# Altium PCB CANDAQ.PcbDoc (part 1 of 2)
Units mm, origin at the board's own origin, x right, y up, seen from the top; angles counter-clockwise.
Board outline 156.2 x 85.4 mm, 2 copper layers (Top Layer, Bottom Layer); 108 components, 143 nets, 695 pads, 135 vias.
Unrouted connection lines stored in the file: 92.
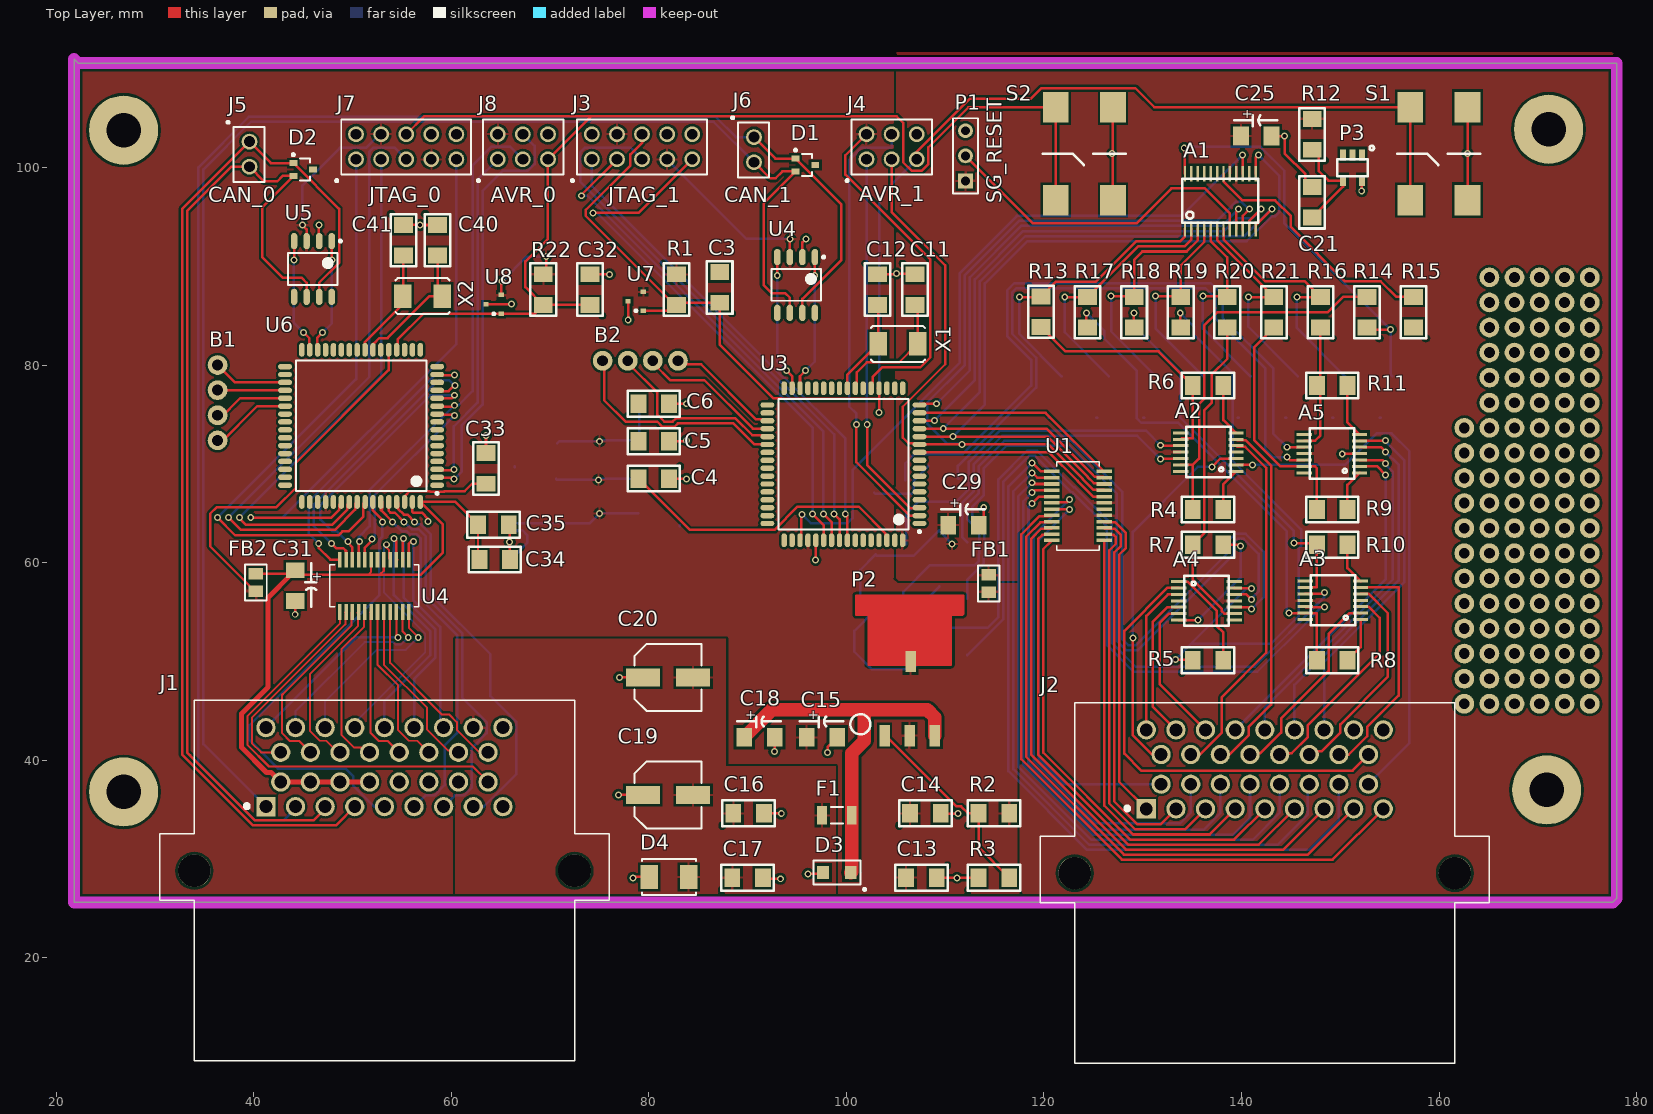
[diagram p0: Top Layer view]
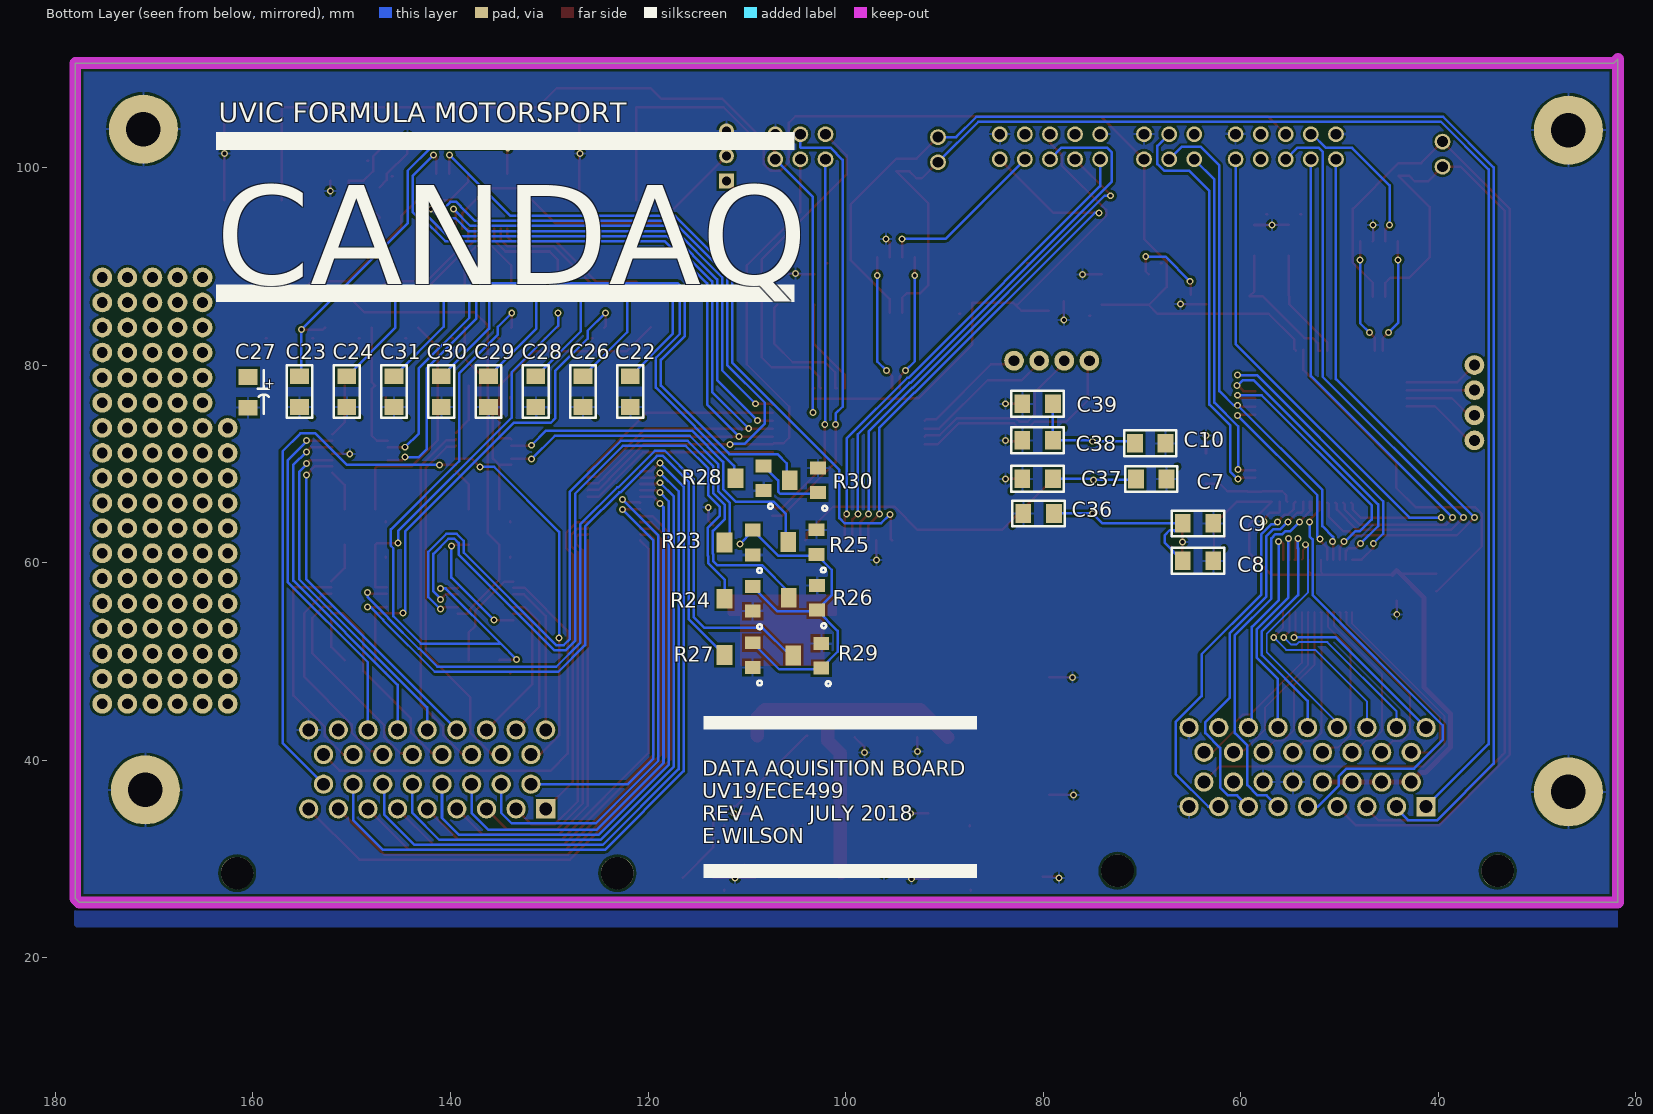
[diagram p1: Bottom Layer view, seen from below]

## Layer stack, top to bottom
Top Solder: solder mask 0.0102, Solder Resist, Dk 3.5
Top Layer: signal copper 0.0356
Dielectric 1: dielectric 0.32, FR-4, Dk 4.8
Bottom Layer: signal copper 0.0356
Bottom Solder: solder mask 0.0102, Solder Resist, Dk 3.5

## Board outline
21.8,111 21.8,25.6 177.6,25.6 178,26 178,110.6 22.2,110.6

## Design rules (kind name [scope] priority, off if disabled: settings)
Clearance [All] p1: gap=0.254 ignorepadtopadclearanceinfootprint=FALSE except(0: Arc-Hole Track-Hole SMDPad-Hole THPad-Hole Via-Hole Fill-Hole Poly-Hole Region-Hole Text-Hole)
PolygonConnect [All] p1: connectstyle=Relief reliefconductorwidth=0.254 reliefentries=4 polygonreliefangle="90 Angle" airgapwidth=0.254
RoutingVias [All] p1: holewidth=0.711 width=1.27 viastyle="Through Hole" minholewidth=0.711 minwidth=1.27 maxholewidth=0.711 maxwidth=1.27
SolderMaskExpansion [All] p1: expansion=0.102
Width [All] p1: maxlimit=2 minlimit=0.1 preferedwidth=0.254
30 further rules are at their usual default settings.

## Classes and differential pairs
component class "Strain Gauge Amplifiers": A2 A3 A4 A5 R4 R5 R6 R7 R8 R9 R10 R11 R23 R24 R25 R26 R27 R28 R29 R30
component class "Strain Gauge ADC": A1 C21 C22 C23 C24 C25 C26 C27 C28 C29 C30 C31 P3 R12 R13 R14 R15 R16 R17 R18 R19 R20 R21
component class Power: C15 C16 C17 C18 C19 C20 D3 D4 F1 P2 R2 R3
component class Peripherials: C13 C14 D1 D2 U4 U5
component class MicrocontrollerTwo: C32 C33 C34 C35 C36 C37 C38 C39 C40 C41 FB2 R22 S2 U6 U8 X2
component class Microcontroller: C3 C4 C5 C6 C7 C8 C9 C10 C11 C12 FB1 R1 S1 U3 U7 X1
component class Connectors: J1 J2 J3 J4 J5 J6 J7 J8 P1
component class bREAKOUT: B1 B2
component class ADC: C29 C31 U1 U4

## Components (designator, comment, footprint, x,y, rotation, side; value= is the part's Value field where it differs from the comment)
A1 "ADS8332IBPWR" TSSOP-24 134.278,93.803 r0 top
A2 "INA3223" TSSOP-14 139.45,69.25 r90 top
A3 "INA3223" TSSOP-14 152.05,54.25 r90 top
A4 "INA3223" TSSOP-14 133.65,58.1 r270 top
A5 "INA3223" TSSOP-14 151.95,69.1 r90 top
B1 "digital breakout" Digital_I/O 33.785,80.015 r270 top
B2 "digital breakout" Digital_I/O 82.931,82.999 r180 top
C3 "CAP 1µF ±10% 16V 0805 X7R" 1206#1 87.06,87.83 r90 top value=1µF
C4 "CAP 0.10µF ±10% 16V 0402 X7R" 1206#1 80.542,68.416 r180 top value=0.10µF
C5 "CAP 0.10µF ±10% 16V 0402 X7R" 1206#1 80.542,72.205 r180 top value=0.10µF
C6 "CAP 1µF ±10% 16V 0805 X7R" 1206#1 80.442,76.194 r0 top value=1µF
C7 "CAP 0.10µF ±10% 16V 0402 X7R" 1206#1 68.997,68.381 r0 bottom value=0.10µF
C8 "CAP 0.10µF ±10% 16V 0402 X7R" 1206#1 64.261,60.096 r0 bottom value=0.10µF
C9 "CAP 1µF ±10% 16V 0805 X7R" 1206#1 64.361,64.09 r180 bottom value=1µF
C10 "CAP 1µF ±10% 16V 0805 X7R" 1206#2 69.2,72.2 r180 bottom value=1µF
C11 "CAP 12pF ±5% 50V 0402 C0G, NP0" 1206#1 107.034,87.706 r270 top value=12pF
C12 "CAP 12pF ±5% 50V 0402 C0G, NP0" 1206#1 103.251,87.706 r270 top value=12pF
C13 "CAP 0.10µF ±10% 16V 0402 X7R" 1206#1 107.64,28.007 r180 top value=0.10µF
C14 "CAP 1µF ±10% 16V 0805 X7R" 1206#1 107.94,34.732 r0 top value=1µF
C15 "Cap Pol3" 1206-Polarized 99.071,42.33 r0 top value="10uF TANTALUM"
C16 "CAP 1nF ±10% 250V 0805 X7R" 1206#1 90.04,34.732 r0 top value=1nF
C17 "CAP 1nF ±10% 250V 0805 X7R" 1206#1 89.94,28.207 r0 top value=1nF
C18 "Cap Pol3" 1206-Polarized 92.74,42.33 r0 top value=10uF
C19 "EEE-FK1V101XP" CAPAE7066X80M 81.93,36.49 r0 top value=100µF
C20 "EEE-FK1V101XP" CAPAE7066X80M 81.93,48.39 r0 top value=100µF
C21 "10uF" 1206#1 147.253,96.546 r270 top
C22 "Cap Semi" 1206#1 121.894,77.28 r90 bottom value=450pF
C23 "Cap Semi" 1206#1 155.383,77.28 r90 bottom value=450pF
C24 "Cap Semi" 1206#1 150.599,77.28 r90 bottom value=450pF
C25 "Cap Pol1" 1206-Polarized 143.041,103.201 r0 top value=10uF
C26 "Cap Semi" 1206#1 126.678,77.28 r90 bottom value=450pF
C27 "Cap Pol1" 1206-Polarized 160.5,75.7 r270 bottom value=22uF
C28 "Cap Semi" 1206#1 131.462,77.28 r90 bottom value=450pF
C29 "Cap Semi" 1206#1 136.246,77.28 r90 bottom value=450pF
C29 "Cap Pol3" 1206-Polarized 113.4,63.8 r0 top value=0.1uF
C30 "Cap Semi" 1206#1 141.03,77.28 r90 bottom value=450pF
C31 "Cap Semi" 1206#1 145.815,77.28 r90 bottom value=450pF
C31 "Cap Pol3" 1206-Polarized 44.196,56.134 r270 top value=0.1uF
C32 "CAP 1µF ±10% 16V 0805 X7R" 1206#1 73.941,87.606 r90 top value=1µF
C33 "CAP 0.10µF ±10% 16V 0402 X7R" 1206#1 63.6,69.6 r270 top value=0.10µF
C34 "CAP 0.10µF ±10% 16V 0402 X7R" 1206#1 64.429,60.234 r180 top value=0.10µF
C35 "CAP 1µF ±10% 16V 0805 X7R" 1206#1 64.2,63.956 r0 top value=1µF
C36 "CAP 0.10µF ±10% 16V 0402 X7R" 1206#1 80.5,65.1 r180 bottom value=0.10µF
C37 "CAP 0.10µF ±10% 16V 0402 X7R" 1206#1 80.6,68.6 r180 bottom value=0.10µF
C38 "CAP 1µF ±10% 16V 0805 X7R" 1206#1 80.5,72.3 r0 bottom value=1µF
C39 "CAP 1µF ±10% 16V 0805 X7R" 1206#2 80.5,76 r0 bottom value=1µF
C40 "CAP 12pF ±5% 50V 0402 C0G, NP0" 1206#1 58.701,92.71 r270 top value=12pF
C41 "CAP 12pF ±5% 50V 0402 C0G, NP0" 1206#1 55.245,92.71 r270 top value=12pF
D1 "PESD1CAN-U" SOT65P210X110-3N 95.842,100.274 r0 top
D2 "PESD1CAN-U" SOT65P210X110-3N 44.993,99.818 r0 top
D3 "BZT52HC30WF-7" SODFL340X115-2N 99.04,28.63 r180 top
D4 "SMAJ30C" SON127P500X135-2N 82.03,28.19 r180 top
F1 "0ZCJ0035AF2E" 0ZCJ-1206-0.9 99.04,34.43 r0 top value=350mA
FB1 "BLM21AG102SH1D" INDC2012X11N 114.4,57.9 r90 top
FB2 "BLM21AG102SH1D" INDC2012X11N 40.2,58 r90 top
J1 "6437288-1" TE_6437288-1 53.213,39.306 r0 top
J2 "6437288-1" TE_6437288-1 142.36,39.08 r0 top
J3 "M20-9980446" M20-9980446 76.759,103.393 r0 top
J4 "M20-9980346" M20-9980346 104.572,103.393 r0 top
J5 "M20-9990246" M20-9990246 39.548,101.373 r270 top
J6 "M20-9990246" M20-9990246 90.635,101.829 r270 top
J7 "M20-9980446" M20-9980446 52.883,103.393 r0 top
J8 "M20-9980346" M20-9980346 67.234,103.393 r0 top
P1 "Header 3" HDR1X3 112.05,98.66 r90 top
P2 "LM1085ISX-5.0/NOPB" TO-263 106.4,42.5 r270 top
P3 "LM4030" so-23 150.294,98.696 r270 top
R1 "RES 1K 1% 1/10 W 0603 ±100ppm/°C" 1206#1 82.88,87.71 r270 top value=10K
R2 "Res3" 1206#1 114.877,34.732 r0 top value="121 1%"
R3 "Res3" 1206#1 114.877,28.207 r0 top value="365 1%"
R4 "Res3" 1206#1 136.559,65.501 r0 top value=1K
R5 "Res3" 1206#1 136.559,50.234 r0 top value=1K
R6 "Res3" 1206#1 136.559,78.047 r0 top value=1K
R7 "Res3" 1206#1 136.559,61.918 r0 top value=1K
R8 "Res3" 1206#1 149.132,50.234 r0 top value=1K
R9 "Res3" 1206#1 149.132,65.501 r0 top value=1K
R10 "Res3" 1206#1 149.132,61.918 r0 top value=1K
R11 "Res3" 1206#1 149.132,78.047 r0 top value=1K
R12 "Res3" 1206#1 147.053,103.328 r90 top value=1K
R13 "Res3" 1206#1 119.801,85.464 r270 top value=50
R14 "Res3" 1206#1 152.605,85.313 r90 top value=50
R15 "Res3" 1206#1 157.32,85.313 r90 top value=0.5
R16 "Res3" 1206#1 147.89,85.313 r90 top value=50
R17 "Res3" 1206#1 124.316,85.313 r90 top value=50
R18 "Res3" 1206#1 129.031,85.313 r90 top value=50
R19 "Res3" 1206#1 133.746,85.313 r90 top value=50
R20 "Res3" 1206#1 138.461,85.313 r90 top value=50
R21 "Res3" 1206#1 143.175,85.313 r90 top value=50
R22 "Res3" 1206#1 69.399,87.706 r270 top value=10K
R23 "RPot" POT 109.4,60.8 r90 bottom value=1K
R24 "RPot" POT 109.4,55.1 r90 bottom value=1K
R25 "RPot" POT 102.95,60.84 r90 bottom value=1K
R26 "RPot" POT 102.9,55.2 r90 bottom value=1K
R27 "RPot" POT 109.4,49.4 r90 bottom value=1K
R28 "RPot" POT 108.3,67.3 r90 bottom value=1K
R29 "RPot" POT 102.45,49.34 r90 bottom value=1K
R30 "RPot" POT 102.8,67.1 r90 bottom value=1K
S1 "SW-PB" Switch 162.886,96.722 r90 top
S2 "SW-PB" Switch 126.987,96.724 r90 top
U1 "MAX11633EEG" 21-0055H_24 123.446,65.752 r0 top
U3 "AT90CAN32-15AT" TQFP80P1600X1600X120-64N 99.695,69.977 r180 top
U4 "SN65HVDA1050AQDRQ1" SOIC127P600X175-8M 94.9,88.13 r270 top
U4 "MAX11633EEG" 21-0055H_24 52.197,57.658 r90 top
U5 "SN65HVDA1050AQDRQ1" SOIC127P600X175-8M 45.971,89.745 r270 top
U6 "AT90CAN32-15AT" TQFP80P1600X1600X120-64N 50.854,73.859 r180 top
U7 "MCP120" MCP120 79.43,85.52 r0 top
U8 "MCP120" MCP120 65.05,85.201 r0 top
X1 "7A-16.000MAAE-T" QFN200P500X320X135-2N 105.211,82.169 r180 top value=16MHz
X2 "7A-16.000MAAE-T" QFN200P500X320X135-2N 57.078,86.995 r180 top value=16MHz

## Footprints (in the part's own frame and the unit in brackets; to place one, negate y for a bottom-side part, rotate by r counter-clockwise, add the part's x,y. Pads: shape width x height; smd on the part's side, far side on the other; paste and mask are expansions set on the pad)
0ZCJ-1206-0.9 [mm]
  rect 1x1.9 smd: 1(-1.5,0) 2(1.5,0)
  silkscreen extent -0.6,-0.85 0.6,0.85, body extent -1.75,-0.9 1.75,0.9, height 0.9
21-0055H_24 [mil]
  rect 63x14 smd: 1(-104.5,137.5) 2(-104.5,112.5) 3(-104.5,87.5) 4(-104.5,62.5) 5(-104.5,37.5) 6(-104.5,12.5) 7(-104.5,-12.5) 8(-104.5,-37.5) 9(-104.5,-62.5) 10(-104.5,-87.5) 11(-104.5,-112.5) 12(-104.5,-137.5) 13(104.5,-137.5) 14(104.5,-112.5) 15(104.5,-87.5) 16(104.5,-62.5) 17(104.5,-37.5) 18(104.5,-12.5) 19(104.5,12.5) 20(104.5,37.5) 21(104.5,62.5) 22(104.5,87.5) 23(104.5,112.5) 24(104.5,137.5)
  silkscreen extent -84,-177 84,177
1206#1 [mm]
  rect 1.6x1.9 smd: 1(-1.5,-0.1) 2(1.6,-0.1)
  Top Layer lines w0.254: -2.6,-1.3 -2.6,-1.4
  silkscreen extent -2.6,-1.4 2.7,1.2
1206#2 [mm]
  rect 1.6x1.9 smd: 1(-1.5,-0.1) 2(1.6,-0.1)
  silkscreen extent -2.6,-1.4 2.7,1.2
1206-Polarized [mm]
  rect 1.6x1.9 smd: 1(-3.1,0) 2(0,0)
  silkscreen extent -3.8,1 0.6,2.1
CAPAE7066X80M [mm] "Aluminum Electrolytic Capacitor, Body 6.60x6.60x8.00mm, IPC Low Density"
  rect 3.45x1.8 smd: 1(-2.55,0) 2(2.55,0)
  silkscreen extent -3.4,-3.4 3.4,3.4, body extent -3.5,-3.4 3.5,3.4, height 8
Digital_I/O [mm]
  round 2 hole 1.1: 0(0,2.54) 1(2.54,2.54) 2(5.08,2.54) 3(7.62,2.54)
HDR1X3 [mm] "Connector; Header; 3 Position"
  rect 1.5x1.5 hole 0.9: 1(0,0)
  round 1.5 hole 0.9: 2(2.54,0) 3(5.08,0)
  silkscreen extent -1.27,-1.27 6.35,1.27
INDC2012X11N [mm] "Chip Inductor, 2-Leads, Body 2.00x1.25mm, IPC Medium Density"
  rect 1.13x1.47 smd: 1(-0.885,0) 2(0.885,0)
  silkscreen extent -1.8,-1.1 1.8,1.1, body extent -1.1,-0.72 1.1,0.72, height 1.05
M20-9980346 [mm]
  round 1.6 hole 1.1: 1(-2.54,-2.54) 2(-2.54,0) 3(0,-2.54) 4(0,0) 5(2.54,-2.54) 6(2.54,0)
  silkscreen extent -4.62,-4.82 4.1,1.5, body extent -3.79,-3.84 3.83,1.2, height 7.13
M20-9980446 [mm]
  round 1.6 hole 1.1: 1(-2.54,-2.54) 2(-2.54,0) 3(0,-2.54) 4(0,0) 5(2.54,-2.54) 6(2.54,0) 7(5.08,-2.54) 8(5.08,0) 9(7.62,-2.54) 10(7.62,0)
  silkscreen extent -4.62,-4.82 9.1,1.5
M20-9990246 [mm]
  round 1.6 hole 1.1: 1(-1.27,0) 2(1.27,0)
  silkscreen extent -3.35,-2.28 2.83,1.5, body extent -2.51,-1.3 2.57,1.2, height 7.13
MCP120 [mm]
  rect 0.535x0.44 smd: 1(0,0) 2(0,1.92) 3(-1.55,0.96)
  silkscreen extent -0.86,-0.11 -0.64,0.11
POT [mm]
  rect 1.3x1.6 smd: 1(0,0) 2(2.5,0)
  rect 2x1.6 smd: 3(1.26,2.85)
  silkscreen extent -1.82,-0.94 -1.34,-0.46
QFN200P500X320X135-2N [mm] "QFN, 2-Leads, Body 5.00x3.20mm, Pitch 2.00mm, IPC Medium Density"
  rect 1.8x2.4 smd: 1(-2,0) 2(2,0)
  silkscreen extent -2.73,-1.83 2.72,1.83, body extent -2.58,-1.68 2.57,1.67, height 1.35
so-23 [mm]
  rect 1.1x0.6 smd: 1(-2.6,1.9) 2(-2.6,0.95) 3(-2.6,0) 4(0,0) 5(0,1.9)
  silkscreen extent -3.52,-0.6 -0.45,3.12
SODFL340X115-2N [mm] "SODFL, 2-Leads, Body 1.75x3.40mm, IPC Medium Density"
  rect 1.2x1.35 smd: 1(-1.4,0) 2(1.4,0)
  silkscreen extent -2.93,-1.2 2.4,1.82, body extent -1.7,-0.9 1.7,0.9, height 1.15
SOIC127P600X175-8M [mm] "SOIC, 8-Leads, Body 4.90x3.90mm, Pitch 1.27mm, IPC Low Density"
  oval 1.65x0.65 smd: 1(-2.825,1.905) 2(-2.825,0.635) 3(-2.825,-0.635) 4(-2.825,-1.905) 5(2.825,-1.905) 6(2.825,-0.635) 7(2.825,0.635) 8(2.825,1.905)
  silkscreen extent -2.95,-2.5 1.6,2.91, body extent -3,-2.5 3,2.5, height 1.75
SON127P500X135-2N [mm] "SON, 2-Leads, Body 3.20x5.00mm, Pitch 1.27mm, IPC Medium Density"
  rect 1.75x2.4 smd: 1(-1.995,0) 2(1.995,0)
  silkscreen extent -2.73,-1.83 2.73,1.83, body extent -2.58,-1.68 2.58,1.68, height 1.35
SOT65P210X110-3N [mm] "SOT23, 3-Leads, Body 2.00x2.10mm, Pitch 0.65mm, IPC Medium Density"
  rect 0.8x0.6 smd: 1(-1,0.65) 2(-1,-0.65) 3(1,0)
  silkscreen extent -1.12,-1.1 0.67,1.62, body extent -1.15,-1.1 1.15,1.1, height 1.1
Switch [mm]
  rect 3.1x2.6 smd: 1(0,5.8) 1(9.4,5.8) 2(0,0) 2(9.4,0)
  silkscreen extent 3.55,-1.3 4.7,7.1
TE_6437288-1 [mm]
  rect 1.95x1.95 hole 1.3: 1(-12,-4)
  round 1.95 hole 1.3: 2(-9,-4) 3(-6,-4) 4(-3,-4) 5(0,-4) 6(3,-4) 7(6,-4) 8(9,-4) 9(12,-4) 10(-10.5,-1.5) 11(-7.5,-1.5) 12(-4.5,-1.5) 13(-1.5,-1.5) 14(1.5,-1.5) 15(4.5,-1.5) 16(7.5,-1.5) 17(10.5,-1.5) 18(-10.5,1.5) 19(-7.5,1.5) 20(-4.5,1.5) 21(-1.5,1.5) 22(1.5,1.5) 23(4.5,1.5) 24(7.5,1.5) 25(10.5,1.5) 26(-12,4) 27(-9,4) 28(-6,4) 29(-3,4) 30(0,4) 31(3,4) 32(6,4) 33(9,4) 34(12,4)
  round 3.3 hole 3.3 unplated: None(-19.25,-10.5) None(19.25,-10.5)
  silkscreen extent -22.75,-29.75 22.75,6.75
TO-263 [mm]
  rect 2.16x1.07 smd: 1(0,-2.54) 2(0,0) 3(0,2.54)
  rect 2.16x1.07 smd mask+0: 4(-7.5,0.1)
  Top Layer region: -14.17,-5.4 -14.17,5.4 -12.32,5.4 -12.26,5.34 -12.26,4.165 -7.18,4.165 -7.18,-4.165 -12.26,-4.165 -12.26,-5.39 -12.27,-5.4
  Top Layer lines w0.254: -12.27,-5.4 -14.17,-5.4 -14.17,3.47 -14.17,3.67 -14.17,4.4 -14.17,5.4 -13.17,5.4 -12.32,5.4 -12.26,5.34 -12.26,4.165 -7.18,4.165 -7.18,0.1 -7.18,-4.165 -9.66,-4.165 -12.26,-4.165 -12.26,-5.39 -12.27,-5.4
  silkscreen extent -2.16,-6.01 -0.14,-3.99
TQFP80P1600X1600X120-64N [mm] "TQFP, 64-Leads, Body 14.00x14.00mm, Pitch 0.80mm, IPC Medium Density"
  oval 1.4x0.55 smd: 1(-7.7,6) 2(-7.7,5.2) 3(-7.7,4.4) 4(-7.7,3.6) 5(-7.7,2.8) 6(-7.7,2) 7(-7.7,1.2) 8(-7.7,0.4) 9(-7.7,-0.4) 10(-7.7,-1.2) 11(-7.7,-2) 12(-7.7,-2.8) 13(-7.7,-3.6) 14(-7.7,-4.4) 15(-7.7,-5.2) 16(-7.7,-6) 33(7.7,-6) 34(7.7,-5.2) 35(7.7,-4.4) 36(7.7,-3.6) 37(7.7,-2.8) 38(7.7,-2) 39(7.7,-1.2) 40(7.7,-0.4) 41(7.7,0.4) 42(7.7,1.2) 43(7.7,2) 44(7.7,2.8) 45(7.7,3.6) 46(7.7,4.4) 47(7.7,5.2) 48(7.7,6)
  oval 0.55x1.4 smd: 17(-6,-7.7) 18(-5.2,-7.7) 19(-4.4,-7.7) 20(-3.6,-7.7) 21(-2.8,-7.7) 22(-2,-7.7) 23(-1.2,-7.7) 24(-0.4,-7.7) 25(0.4,-7.7) 26(1.2,-7.7) 27(2,-7.7) 28(2.8,-7.7) 29(3.6,-7.7) 30(4.4,-7.7) 31(5.2,-7.7) 32(6,-7.7) 49(6,7.7) 50(5.2,7.7) 51(4.4,7.7) 52(3.6,7.7) 53(2.8,7.7) 54(2,7.7) 55(1.2,7.7) 56(0.4,7.7) 57(-0.4,7.7) 58(-1.2,7.7) 59(-2,7.7) 60(-2.8,7.7) 61(-3.6,7.7) 62(-4.4,7.7) 63(-5.2,7.7) 64(-6,7.7)
  silkscreen extent -7.83,-6.6 6.6,6.95, body extent -8,-8 8,8, height 1.2
TSSOP-14 [mm]
  rect 0.3x1.55 smd: 1(0,0) 2(0.65,0) 3(1.3,0) 4(1.95,0) 5(2.6,0) 6(3.25,0) 7(3.9,0) 8(3.9,5.6) 9(3.25,5.6) 10(2.6,5.6) 11(1.95,5.6) 12(1.3,5.6) 13(0.65,5.6) 14(0,5.6)
  silkscreen extent -0.6,0.55 4.5,5.05
TSSOP-24 [mm]
  rect 0.25x1.55 smd: 1(0,0) 2(0.65,0) 3(1.3,0) 4(1.95,0) 5(2.6,0) 6(3.25,0) 7(3.9,0) 8(4.55,0) 9(5.2,0) 10(5.85,0) 11(6.5,0) 12(7.15,0) 13(7.15,5.6) 14(6.5,5.6) 15(5.85,5.6) 16(5.2,5.6) 17(4.55,5.6) 18(3.9,5.6) 19(3.25,5.6) 20(2.6,5.6) 21(1.95,5.6) 22(1.3,5.6) 23(0.65,5.6) 24(0,5.6)
  silkscreen extent -0.3,0.6 7.4,5.1

## Part data
B1 B2: library part Digital_I/O
C3 C6 C9 C10 C14 C32 C35 C38 C39: library part CC0805KKX7R7BB105, Manufacturer=Yageo, Manufacturer Series=CC, Package=0805, Supplier Part Number 1=311-1365-1-ND, Temperature Coefficient=X7R, Temperature Range="-55°C ~ 125°C", Tolerance=±10%, Voltage=16V, Component Type=Standard, Part Number=CC0805KKX7R7BB105, Supplier 1=Digi-Key
C4 C5 C7 C8 C13 C33 C34 C36 C37: library part CC0402KRX7R7BB104, Manufacturer=Yageo, Manufacturer Series=CC, Package=0402, Supplier Part Number 1=311-1338-1-ND, Temperature Coefficient=X7R, Temperature Range="-55°C ~ 125°C", Tolerance=±10%, Voltage=16V, Component Type=Standard, Part Number=CC0402KRX7R7BB104, Supplier 1=Digi-Key
C11 C12 C40 C41: library part CC0402JRNPO9BN120, Manufacturer=Yageo, Manufacturer Series=CC, Package=0402, Supplier Part Number 1=311-1016-1-ND, Temperature Coefficient="C0G, NP0", Temperature Range="-55°C ~ 125°C", Tolerance=±5%, Voltage=50V, Component Type=Standard, Part Number=CC0402JRNPO9BN120, Supplier 1=Digi-Key
C15 C18 C29 C31: "Polarized Capacitor (Surface Mount)", LatestRevisionDate=29-May-2009, LatestRevisionNote="IPC-7351 Footprint Added.", PackageDescription="Chip Capacitor", PackageReference=C0805, Published=8-Jun-2000, Publisher="Altium Limited"
C16 C17: library part CC0805KRX7RYBB102, Manufacturer=Yageo, Manufacturer Series=CC, Package=0805, Supplier Part Number 1=311-1470-1-ND, Temperature Coefficient=X7R, Temperature Range="-55°C ~ 125°C", Tolerance=±10%, Voltage=250V, Component Type=Standard, Part Number=CC0805KRX7RYBB102, Supplier 1=Digi-Key
C19 C20: Supplier Part Number 1=PCE3836CT-ND, Supplier 1=Digi-Key
C21: library part "Cap Semi", "Capacitor (Semiconductor SIM Model)", LatestRevisionDate=29-May-2009, LatestRevisionNote="IPC-7351 Footprint Added.", PackageDescription="Chip Capacitor", PackageReference=C1206, Published=8-Jun-2000, Publisher="Altium Limited"
C22 C23 C24 C26 C28 C29 C30 C31: "Capacitor (Semiconductor SIM Model)", LatestRevisionDate=29-May-2009, LatestRevisionNote="IPC-7351 Footprint Added.", PackageDescription="Chip Capacitor", PackageReference=C1206, Published=8-Jun-2000, Publisher="Altium Limited"
C25 C27: "Polarized Capacitor (Radial)", LatestRevisionDate=17-Jul-2002, LatestRevisionNote="Re-released for DXP Platform.", PackageDescription="Polarized Capacitor (Radial); 2 Leads", PackageReference=RB7.6-15, Published=8-Jun-2000, Publisher="Altium Limited"
D3: Supplier Part Number 1=BZT52HC30WF-7DICT-ND, Supplier 1=Digi-Key
FB1 FB2: Supplier Part Number 1=490-10664-1-ND, Supplier 1=Digi-Key
J1 J2: "34 Position 4 Row Right Angle Receptacle Through Hole Super Seal Cap Assy", Package=None, Digi-Key_Part_Number=A124384-ND, Digi-Key_Purchase_URL=https://www.digikey.ca/product-detail/en/te-connectivity-amp-connectors/6437288-1/A124384-ND/5428601?utm_source=snapeda&utm_medium=aggregator&utm_campaign=symbol, EU_RoHS_Compliance=Compliant, Link=http://www.te.com/usa-en/product-6437288-1.html, MF="TE Connectivity", MP=6437288-1, SnapEDA_Link=https://www.snapeda.com/parts/6437288-1/TE%20Connectivity%20AMP%20Connectors/view-part/?ref=snap
J3 J7: "2.54mm Header 2x4-Pin"
J4 J8: "2.54mm Header 2x3-Pin", Supplier Part Number 1=952-2121-ND, Supplier 1=Digi-Key
J5 J6: "2.54mm Header 1x2-Pin", Supplier Part Number 1=952-2262-ND, Supplier 1=Digi-Key
P1: "Header, 3-Pin", LatestRevisionDate=17-Jul-2002, LatestRevisionNote="Re-released for DXP Platform.", Publisher="Altium Limited"
R1: library part Res3, "Resistor", LatestRevisionDate=29-May-2009, LatestRevisionNote="IPC-7351 Footprint Added.", PackageDescription="Chip Resistor", PackageReference=J1-0603, Published=8-Jun-2000, Publisher="Altium Limited"
R2 R3 R4 R5 R6 R7 R8 R9 R10 R11 R12 R13 R14 R15 R16 R17 R18 R19 R20 R21 R22: "Resistor", LatestRevisionDate=29-May-2009, LatestRevisionNote="IPC-7351 Footprint Added.", PackageDescription="Chip Resistor", PackageReference=J1-0603, Published=8-Jun-2000, Publisher="Altium Limited"
R23 R24 R25 R26 R27 R28 R29 R30: "Potentiometer", LatestRevisionDate=17-Jul-2002, LatestRevisionNote="Re-released for DXP Platform.", PackageDescription="Variable Resistor, Thru-Hole; 3 Leads", PackageReference=VR5, Published=8-Jun-2000, Publisher="Altium Limited", Set Position=0.5, Sim Note="Enter the Resistance value and the set point into parameter fields."
S1 S2: "Switch", LatestRevisionDate=17-Jul-2002, LatestRevisionNote="Re-released for DXP Platform.", PackageDescription="Switch; 2 Leads", PackageReference=SPST-2, Published=24-Mar-1999, Publisher="Altium Limited"
U1 U4: "ADC Single SAR 300ksps 12-bit Serial 24-Pin QSOP", Package="QSOP-24 Maxim Integrated", Digi-Key_Part_Number=MAX11633EEG+-ND, Digi-Key_Purchase_URL=https://www.digikey.ca/product-detail/en/maxim-integrated/MAX11633EEG-/MAX11633EEG--ND/2591497?utm_source=snapeda&utm_medium=aggregator&utm_campaign=symbol, MF="Maxim Integrated", MP=MAX11633EEG+, SnapEDA_Link=https://www.snapeda.com/parts/MAX11633EEG%2B/Maxim%20Integrated/view-part/?ref=snap
U3 U6: Supplier Part Number 1=AT90CAN32-15ATCT-ND, Supplier 1=Digi-Key
U4 U5: "CAN transceiver", Supplier Part Number 1=296-25836-1-ND, Supplier 1=Digi-Key
X1 X2: "SMD Crystal Oscillator 12 pF", Load Capacitance=12pF, Supplier Part Number 1=887-1747-1-ND, Supplier 1=Digi-Key

## Free pads (board coordinates)
  round 2 hole 1.1: 4(165.1,78.74) 4(165.1,81.28) 4(165.1,83.82) 4(165.1,86.36) 4(165.1,88.9) 5(167.64,78.74) 5(167.64,81.28) 5(167.64,83.82) 5(167.64,86.36) 5(167.64,88.9) 6(170.18,78.74) 6(170.18,81.28) 6(170.18,83.82) 6(170.18,86.36) 6(170.18,88.9) 8(165.1,76.2) 9(167.64,76.2) 10(170.18,76.2) 11(162.56,73.66) 12(165.1,73.66) 13(167.64,73.66) 14(170.18,73.66) 15(162.56,71.12) 16(165.1,71.12) 17(167.64,71.12) 18(170.18,71.12) 19(165.1,68.58) 20(165.1,68.58) 21(167.64,68.58) 22(167.64,68.58) 23(170.18,68.58) 24(162.56,68.58) 25(162.56,66.04) 26(165.1,66.04) 27(167.64,66.04) 28(170.18,66.04) 29(162.56,63.5) 30(165.1,63.5) 31(167.64,63.5) 32(170.18,63.5) 33(162.56,60.96) 34(165.1,60.96) 35(167.64,60.96) 36(170.18,60.96) 37(162.56,58.42) 39(165.1,58.42) 40(167.64,58.42) 41(170.18,58.42) 42(162.56,55.88) 43(165.1,55.88) 44(167.64,55.88) 45(170.18,55.88) 46(162.56,53.34) 47(165.1,53.34) 48(167.64,53.34) 49(170.18,53.34) 50(162.56,50.8) 51(165.1,50.8) 52(167.64,50.8) 53(170.18,50.8) 54(162.56,48.26) 55(165.1,48.26) 56(167.64,48.26) 57(170.18,48.26) 58(162.56,45.72) 59(165.1,45.72) 60(167.64,45.72) 61(170.18,45.72) 62(172.72,45.72) 63(172.72,50.8) 64(172.72,50.8) 65(172.72,48.26) 66(172.72,53.34) 67(172.72,55.88) 68(172.72,58.42) 69(172.72,60.96) 70(172.72,63.5) 72(172.72,68.58) 73(172.72,68.58) 74(172.72,66.04) 75(172.72,71.12) 76(172.72,73.66) 77(172.72,76.2) 78(172.72,78.74) 78(172.72,81.28) 78(172.72,83.82) 78(172.72,86.36) 78(172.72,88.9) 79(175.26,78.74) 79(175.26,81.28) 79(175.26,83.82) 79(175.26,86.36) 79(175.26,88.9) 80(175.26,76.2) 81(175.26,73.66) 82(175.26,71.12) 83(175.26,68.58) 84(175.26,66.04) 85(175.26,63.5) 86(175.26,60.96) 87(175.26,58.42) 88(175.26,55.88) 89(175.26,53.34) 90(175.26,48.26) 91(175.26,48.26) 92(175.26,50.8) 93(175.26,45.72)
  round 7 hole 3.5: 95(26.8,36.8) 95(26.8,103.8) 95(170.9,37) 95(171.1,103.9)

## Via types
v1: diameter 0.7, hole 0.4, Top Layer to Bottom Layer, 135 vias

## Nets (pads, with @x,y where several pads share a name; then routed paths per layer and width w, separated by ;. In a path a pad name is that pad's centre, name@x,y a point inside that pad or via, vN(x,y) a via of type N, cw(c..) or ccw(c..) an arc to the next point about the centre after c; other vN are vias at no path point)
+4.096V: C21.2 C27.1 P3.4 R12.1 R15.1 | length 10.4
  Top Layer w0.254: C21.2@147.153,94.946 150.294,98.087 P3.4@150.294,98.696 148.792,98.696 147.845,99.643 147.845,101.136 147.79,101.191 R12.1@147.153,101.828
+5V: C7.2 C8.2 C9.1 C10.1 C13.2 C14.1 C15.1 C36.2 C37.2 C38.1 C39.1 FB1.1 FB2.1 J3.4 J3.7 J4.2 J7.4 J7.7 J8.2 P2.2 P2.4 R1.1 R2.2 R22.1 U3.21 U3.52 U4.3@94.265,90.955 U5.3 U6.21 U6.52 U7.2 U8.2 | length 154.7
  Top Layer w0.254: FB2.1@40.2,57.115 40.131,57.115 35.579,61.667 35.579,64.967 36.216,65.604 42.252,65.604 44.235,67.587 44.235,70.106 53.644,79.515 53.644,81.549 U6.21@53.654,81.559 ; v1(44.9,94.2) 45.336,93.764 U5.3@45.336,92.57 ; U8.2@65.05,87.121 65.05,88.45 v1(65.1,88.5) ; R22.1@69.299,89.206 69.6,89.507 v1(69.6,91) ; U4.3@94.265,90.955 94.265,92.765 v1(94.3,92.8) ; J4.2@102.032,103.393 99.9,101.261 99.9,99.3 108.492,90.708 108.492,80.811 107.473,79.792 103.616,79.792 102.639,78.815 102.639,77.821 U3.21@102.495,77.677
  Bottom Layer w0.254: v1(44.9,94.2) 44.9,98.2 48.7,102 49.82,102 49.854,102.034 51.382,102.034 52.741,103.393 J7.4@52.883,103.393 ; v1(65.1,88.5) 67.6,91 v1(69.6,91) ; C8.2@65.861,60.196 67.7,62.035 67.7,62.769 67.171,63.298 66.652,63.298 66.652,63.199 C9.1@65.861,63.99 73.99,63.99 v1(75,65) C36.2@78.9,65 ; C7.2@70.597,68.481 70.678,68.4 v1(74.9,68.4) 75,68.5 C37.2@79,68.5 ; C10.1@70.7,72.1 70.9,72.3 v1(75,72.3) 75.1,72.4 C38.1@79,72.4 C39.1@79,76.1 ; J3.7@81.839,100.853 89.892,92.8 v1(94.3,92.8)
+5V_A: A1.16 A1.17 A2.11 A3.11 A4.11 A5.11 C5.2 C6.1 C25.1 C29.1@110.3,63.8 FB1.2 J2.33 P1.1 R12.2 R23.2 R24.2 R25.1 R26.1 R27.2 R28.2 R29.1 R30.1 U1.17 U1.19 U3.64 | length 46.9
  Bottom Layer w0.254: R30.1@102.8,67.1 102.921,66.979 106.608,66.979 106.831,67.202 106.831,68.331 R28.2@108.3,69.8 ; R27.2@109.4,51.9 106.719,49.219 102.571,49.219 R29.1@102.45,49.34 100.8,50.99 100.8,53.1 R26.1@102.9,55.2 ; R24.2@109.4,57.6 106.879,55.079 103.021,55.079 R26.1@102.9,55.2 ; v1(110.7,61.9) 109.4,63.2 R23.2@109.4,63.3 106.819,60.719 103.071,60.719 R25.1@102.95,60.84 101.4,59.29 101.4,56.7 R26.1@102.9,55.2
+5V_A_2: C31.1@44.196,59.234 C34.2 C35.1 FB2.2 J1.10 J1.11 J1.12 J1.13 U4.17 U4.19 U6.64 | length 74
  Top Layer w0.2: 51.6,58.8 51.88,59.079 U4.19@51.88,60.312 ; C35.1@62.7,63.856 62.7,60.463 C34.2@62.829,60.334
  Top Layer w0.254: FB2.2@40.2,58.885 C31.1@43.847,58.885 ; C31.1@44.63,58.8 51.6,58.8 52.757,58.8 ; U4.17@53.149,60.312 53.149,59.193 52.757,58.8 ; C35.1@62.7,63.856 60.397,66.159 U6.64@56.854,66.159 59.1,63.913 59.1,61 56.9,58.8 52.757,58.8
  Top Layer w0.5: C31.1@44.63,58.8 C31.1@44.196,59.234 43.847,58.885 41.439,56.477 41.439,47.424 38.742,44.727 38.742,41.303 41.279,38.766 41.753,38.766 J1.10@42.713,37.806 J1.11@45.713,37.806 J1.12@48.713,37.806 J1.13@51.713,37.806
+VBAT: C16.1 C17.1 C19.2 C20.2 D4.1 F1.1 J1.33
+VBAT_PROT: C18.1 D3.1 F1.2 P2.3 | length 39.4
  Top Layer w1.37: C18.1@89.64,42.33 92.41,45.1 108.2,45.1 108.94,44.36 P2.3@108.94,42.5 ; D3.1@100.44,28.63 100.54,28.73 F1.2@100.54,34.43 100.54,40.721 101.8,41.981 101.8,44.84
\C\O\N\V\S\T\: A1.15 U3.51 | length 73.2
  Top Layer w0.254: U3.51@95.295,62.277 95.439,62.421 95.439,64.839 v1(95.5,64.9) ; v1(140.1,101.3) 140.128,101.272 A1.15@140.128,99.403
  Bottom Layer w0.254: v1(95.5,64.9) 96.4,64 100.1,64 100.612,64.512 100.612,69.412 111.476,80.276 111.476,89.331 117.261,95.116 133.916,95.116 v1(140.1,101.3)
A_SENS_0: J2.16 U1.1 | length 76.2
  Top Layer w0.254: v1(118.8,70.1) 118.834,70.1 119.689,69.245 U1.1@120.791,69.245
  Bottom Layer w0.254: v1(118.8,70.1) 118.766,70.1 116.4,67.734 116.4,38.9 124.372,30.928 146.828,30.928 149.86,33.96 J2.16@149.86,37.58
A_SENS_0_2: J1.17 U4.1@48.704,55.004 | length 43.2
  Top Layer w0.2: U4.1@48.704,55.004 48.704,53.835 39.346,44.477 39.346,41.553 41.529,39.37 62.149,39.37 J1.17@63.713,37.806
A_SENS_1: J2.15 U1.2 | length 70.4
  Top Layer w0.254: v1(118.8,69.1) 118.834,69.1 119.324,68.61 U1.2@120.791,68.61
  Bottom Layer w0.254: v1(118.8,69.1) 118.766,69.1 116.908,67.242 116.908,39.11 124.582,31.436 143.634,31.436 146.716,34.518 146.716,37.436 J2.15@146.86,37.58
A_SENS_1_2: J1.18 U4.2@49.34,55.004 | length 20.5
  Top Layer w0.2: J1.18@42.713,40.806 40.735,40.806 39.8,41.741 39.8,44.289 49.263,53.752 U4.2@49.263,54.927
  Top Layer w0.254: U4.2@49.263,54.927 U4.2@49.34,55.004
A_SENS_2: J2.14 U1.3 | length 65
  Top Layer w0.254: v1(118.8,68.1) 118.925,67.975 U1.3@120.791,67.975
  Bottom Layer w0.254: v1(118.8,68.1) 118.766,68.1 117.416,66.75 117.416,39.321 124.793,31.944 141.142,31.944 143.86,34.662 J2.14@143.86,37.58
A_SENS_2_2: J1.19 U4.3@49.974,55.004 | length 18.9
  Top Layer w0.2: 42.857,46.627 42.857,42.744 43.651,41.95 44.569,41.95 J1.19@45.713,40.806 ; 42.9,46.67 49.898,53.668 U4.3@49.898,54.927
  Top Layer w0.254: 42.857,46.627 42.9,46.67 ; U4.3@49.898,54.927 U4.3@49.974,55.004
A_SENS_3: J2.13 U1.4 | length 60
  Top Layer w0.254: v1(118.8,67.1) 119.04,67.34 U1.4@120.791,67.34
  Bottom Layer w0.254: v1(118.8,67.1) 117.924,66.224 117.924,39.531 125.003,32.452 139.152,32.452 140.86,34.16 J2.13@140.86,37.58
A_SENS_3_2: J1.20 U4.4@50.609,55.004 | length 18.3
  Top Layer w0.2: J1.20@48.857,40.95 48.35,40.95 47.323,41.977 46.663,41.977 45.7,42.94 45.7,48.752 50.533,53.585 U4.4@50.533,54.927
  Top Layer w0.254: J1.20@48.713,40.806 J1.20@48.857,40.95 ; U4.4@50.533,54.927 U4.4@50.609,55.004
A_SENS_4: J2.12 U1.5 | length 54.6
  Top Layer w0.254: v1(118.8,66) 119.505,66.705 U1.5@120.791,66.705
  Bottom Layer w0.254: v1(118.8,66) 118.432,65.632 118.432,39.742 125.214,32.96 136.158,32.96 137.86,34.662 J2.12@137.86,37.58
A_SENS_4_2: J1.21 U4.5@51.244,55.004 | length 17
  Top Layer w0.2: U4.5@51.168,54.927 51.168,53.54 48.857,51.229 48.857,42.58 50.162,41.274 J1.21@51.244,41.274
  Top Layer w0.254: U4.5@51.168,54.927 U4.5@51.244,55.004 ; J1.21@51.244,41.274 J1.21@51.713,40.806
A_SENS_5: J2.11 U1.6 | length 51.8
  Top Layer w0.254: U1.6@120.791,66.07 120.852,66.131 122.331,66.131 v1(122.6,66.4)
  Bottom Layer w0.254: v1(122.6,66.4) 122.566,66.4 118.94,62.774 118.94,39.952 125.292,33.6 133.798,33.6 134.86,34.662 J2.11@134.86,37.58
A_SENS_5_2: J1.22 U4.6@51.88,55.004 | length 16
  Top Layer w0.2: U4.6@51.803,54.927 51.803,42.798 52.651,41.95 53.569,41.95 J1.22@54.713,40.806
  Top Layer w0.254: U4.6@51.803,54.927 U4.6@51.88,55.004
A_SENS_6: J2.10 U1.7 | length 41.8
  Top Layer w0.254: U1.7@120.791,65.435 122.565,65.435 v1(122.6,65.4)
  Bottom Layer w0.254: v1(122.6,65.4) 119.448,62.248 119.448,40.163 122.031,37.58 J2.10@131.86,37.58
A_SENS_6_2: J1.23 U4.7@52.514,55.004 | length 16.9
  Top Layer w0.2: U4.7@52.514,55.004 52.514,49.685 54.6,47.6 54.6,43.04 55.663,41.977 56.542,41.977 J1.23@57.713,40.806
A_SENS_7: J2.9 U1.8 | length 69.6
  Top Layer w0.254: U1.8@120.791,64.8 120.715,64.724 119.558,64.724 117.7,62.866 117.7,40.126 127.882,29.944 149.224,29.944 J2.9@154.36,35.08
A_SENS_7_2: J1.24 U4.8@53.149,55.004 | length 17.8
  Top Layer w0.2: U4.8@53.149,55.004 53.15,51.91 53.149,49.693 57.542,45.3 57.542,43.098 59.663,40.977 60.542,40.977 J1.24@60.713,40.806
A_SENS_8: J2.8 U1.9 | length 64.7
  Top Layer w0.254: U1.9@120.791,64.165 120.715,64.089 119.641,64.089 118.208,62.656 118.208,40.337 128.093,30.452 146.732,30.452 J2.8@151.36,35.08
A_SENS_8_2: J1.25 U4.9 | length 19.3
  Top Layer w0.2: U4.9@53.785,55.004 53.785,49.855 59.005,44.635 59.763,44.635 60.542,43.856 60.542,43.098 62.834,40.806 J1.25@63.713,40.806
A_SENS_9: J2.7 U1.10 | length 59.8
  Top Layer w0.254: U1.10@120.791,63.53 120.791,63.454 119.725,63.454 118.716,62.445 118.716,40.547 128.303,30.96 144.24,30.96 J2.7@148.36,35.08
A_SENS_9_2: J1.26 U4.10 | length 19.8
  Top Layer w0.2: v1@54.419,52.642 U4.10@54.419,55.004
  Top Layer w0.254: v1@54.419,52.642 v1(54.61,52.451)
  Bottom Layer w0.254: J1.26@41.213,43.306 50.358,52.451 v1(54.61,52.451)
A_SENS_10: J2.6 U1.11 | length 54.6
  Top Layer w0.254: U1.11@120.791,62.895 120.715,62.819 119.833,62.819 119.415,62.4 119.415,40.567 128.514,31.468 141.748,31.468 J2.6@145.36,35.08
A_SENS_10_2: J1.27 U4.11 | length 19.3
  Top Layer w0.2: U4.11@55.054,55.004 55.054,53.04 v1@55.626,52.469
  Top Layer w0.254: J1.27@44.213,43.306 J1.27@44.322,43.306 ; v1(55.626,52.451) v1@55.626,52.469
  Bottom Layer w0.2: J1.27@44.213,43.306 44.213,44.973 51.21,51.97 54.095,51.97 54.318,51.747 54.902,51.747 55.606,52.451 v1(55.626,52.451)
A_SENS_11: J2.5 U1.12 | length 49.2
  Top Layer w0.254: U1.12@120.791,62.26 119.923,61.391 119.923,40.777 128.724,31.976 139.256,31.976 J2.5@142.36,35.08
A_SENS_11_2: J1.28 U4.12 | length 17.7
  Top Layer w0.2: U4.12@55.689,55.004 55.689,53.421 v1@56.642,52.469
  Top Layer w0.254: v1(56.642,52.451) v1@56.642,52.469
  Bottom Layer w0.2: J1.28@47.213,43.306 47.213,45.973 52.43,51.19 55.381,51.19 v1(56.642,52.451)
A_SENS_12: J2.4 U1.13 | length 42.4
  Top Layer w0.254: U1.13@126.1,62.26 126.1,35.4 129.016,32.484 136.764,32.484 J2.4@139.36,35.08
A_SENS_12_2: J1.32 U4.13 | length 22.6
  Top Layer w0.254: U4.13@55.689,60.312 55.689,61.932 56.15,62.393 v1(56.15,62.173)
  Bottom Layer w0.254: v1@56.15,62.16 56.15,56.197 58.847,53.5 58.847,43.672 J1.32@59.213,43.306
A_SENS_13: J2.3 U1.14 | length 40.3
  Top Layer w0.254: U1.14@126.1,62.895 126.176,62.819 127.058,62.819 127.281,62.596 127.281,61.924 126.608,61.251 126.608,35.625 129.241,32.992 134.272,32.992 J2.3@136.36,35.08
A_SENS_13_2: J1.31 U4.14 | length 24
  Top Layer w0.254: v1@55.054,62.554 v1@55.163,62.663 ; U4.14@55.131,60.312 U4.14@55.054,60.312 55.054,62.331 v1(55.163,62.44) ; J1.31@56.213,43.306 J1.31@56.213,43.805
  Bottom Layer w0.254: v1@55.163,62.16 55.163,56.465 58.339,53.289 58.339,50.369 56.213,48.243 J1.31@56.213,43.306
A_SENS_14: J2.2 U1.15 | length 37.1
  Top Layer w0.254: U1.15@126.1,63.53 126.176,63.454 127.141,63.454 127.789,62.806 127.789,61.714 127.116,61.041 127.116,35.835 129.451,33.5 131.78,33.5 J2.2@133.36,35.08
A_SENS_14_2: J1.30 U4.15 | length 24.6
  Top Layer w0.254: v1(54.177,62.44) 54.419,62.197 U4.15@54.419,60.312 U4.15@54.496,60.312
  Bottom Layer w0.254: J1.30@53.213,43.306 53.213,46.013 57.831,50.631 57.831,53.079 54.177,56.733 54.177,61.446 54.213,61.483 54.213,62.124 v1@54.177,62.16
A_SENS_15: J2.1 U1.16 | length 32.1
  Top Layer w0.254: U1.16@126.1,64.165 126.1,64.089 127.225,64.089 128.297,63.016 128.297,61.504 127.624,60.83 127.624,37.816 J2.1@130.36,35.08
A_SENS_15_2: J1.29 U4.16 | length 25
  Top Layer w0.2: v1@53.435,61.906 53.44,61.901 v1(53.44,61.828) 53.44,61.5 53.681,61.259 53.681,60.416 U4.16@53.785,60.312
  Bottom Layer w0.2: J1.29@50.213,43.306 50.213,43.813 57.35,50.95 57.35,52.82 53.19,56.98 53.19,61.578 v1(53.44,61.828)
ADC_0_2: J1.8 U6.61 | length 38.7
  Top Layer w0.254: U6.61@54.454,66.159 54.598,66.015 54.598,65.459 55.182,64.875 55.541,64.875 v1(56.272,64.144)
  Bottom Layer w0.254: v1(56.272,64.144) 56.496,63.92 56.873,63.92 57.922,62.871 57.922,56.754 63.944,50.732 63.944,46.493 66.569,43.868 66.569,38.601 63.274,35.306 J1.8@62.213,35.306
ADC_1_2: J1.7 U6.60 | length 38
  Top Layer w0.254: U6.60@53.654,66.159 53.654,65.243 53.819,65.078 54.261,65.078 v1(55.195,64.144)
  Bottom Layer w0.254: v1(55.195,64.144) 55.239,64.144 55.97,63.412 56.663,63.412 57.414,62.661 57.414,56.543 61.077,52.88 61.077,46.36 63.569,43.868 63.569,42.744 62.069,41.244 62.069,37.244 61.275,36.45 60.357,36.45 J1.7@59.213,35.306
ADC_2_2: J1.6 U6.59 | length 37.8
  Top Layer w0.254: U6.59@52.854,66.159 52.854,65.325 54.029,64.15 v1(54.029,64.144) ; 52.998,65.462 U6.59@52.998,66.159
  Bottom Layer w0.254: v1(54.029,64.144) 55.002,63.171 55.493,63.171 55.76,62.904 56.452,62.904 56.881,62.476 56.881,56.358 60.569,52.67 60.569,42.744 59.317,41.492 59.317,37.492 58.275,36.45 57.357,36.45 J1.6@56.213,35.306
ADC_3_2: J1.5 U6.58 | length 47.3
  Top Layer w0.254: U6.58@52.054,66.159 52.054,65.297 53.001,64.35 v1(53.001,64.144) ; v1@53.001,63.921 v1@53.001,64.107
  Bottom Layer w0.254: v1(53.001,64.144) 53.001,62.651 52.709,62.359 52.709,56.72 39.532,43.543 39.532,42.069 42.439,39.162 49.275,39.162 50.069,38.368 50.069,37.415 52.178,35.306 J1.5@53.213,35.306
CAN_H: D1.1 J1.2 J6.1 U4.7@95.535,85.305 | length 156.8
  Top Layer w0.254: J6.1@90.635,103.099 92.81,100.924 D1.1@94.842,100.924 99.476,96.29 99.476,90.658 95.535,86.717 U4.7@95.535,85.305
  Bottom Layer w0.254: J1.2@44.213,35.306 44.213,35.097 43.066,33.95 40.08,33.95 34.375,39.655 34.375,100.041 39.498,105.164 86.748,105.164 88.813,103.099 J6.1@90.635,103.099